# Altium PCB nrf52833_cjaa_var4.PcbDoc
Units mm, origin at the board's own origin, x right, y up, seen from the top; angles counter-clockwise.
Board outline 12 x 12 mm, 6 copper layers (Top Layer, Mid Layer 1, Mid Layer 2, Mid Layer 3, Mid Layer 4, Bottom Layer), stack 1.613 mm thick; 24 components, 61 nets, 161 pads, 108 vias.
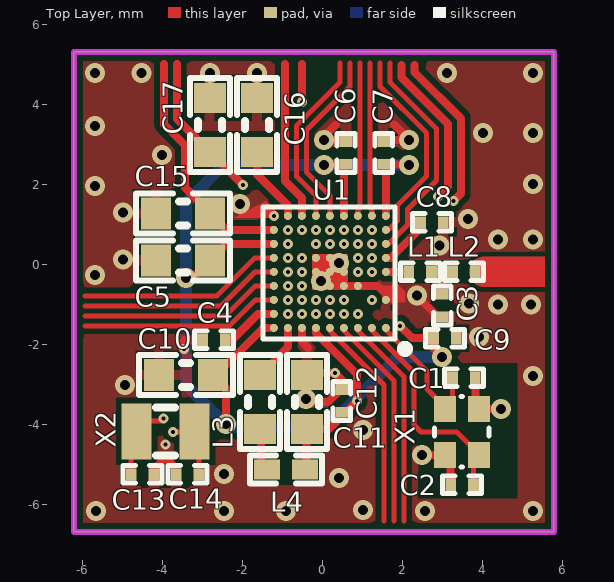
[diagram p0: Top Layer view]
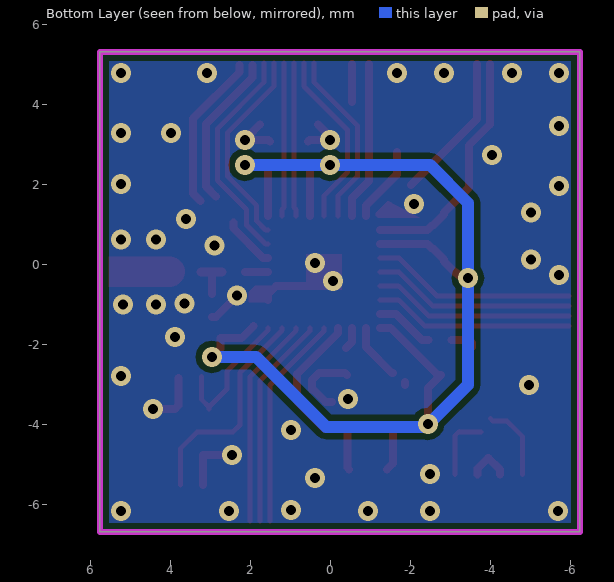
[diagram p1: Bottom Layer view, seen from below]
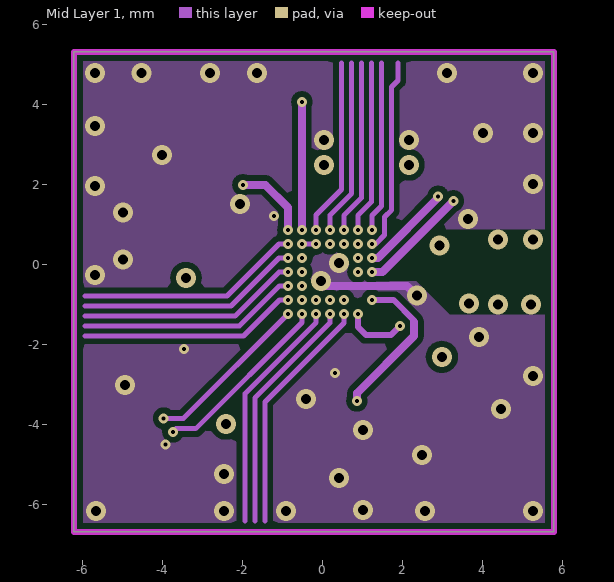
[diagram p2: Mid Layer 1]
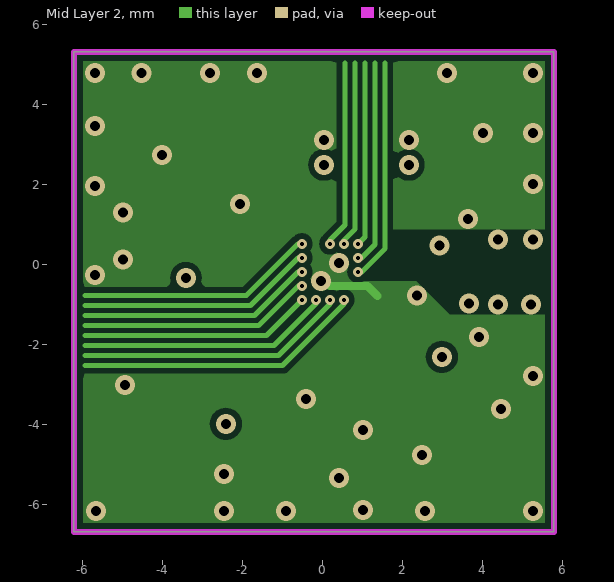
[diagram p3: Mid Layer 2]
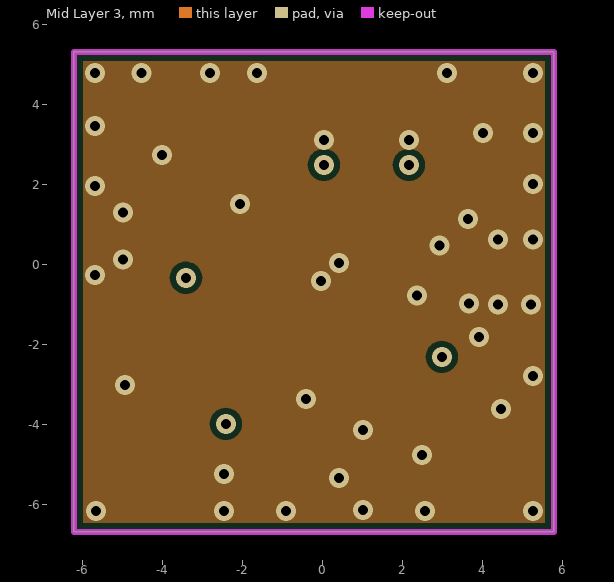
[diagram p4: Mid Layer 3]
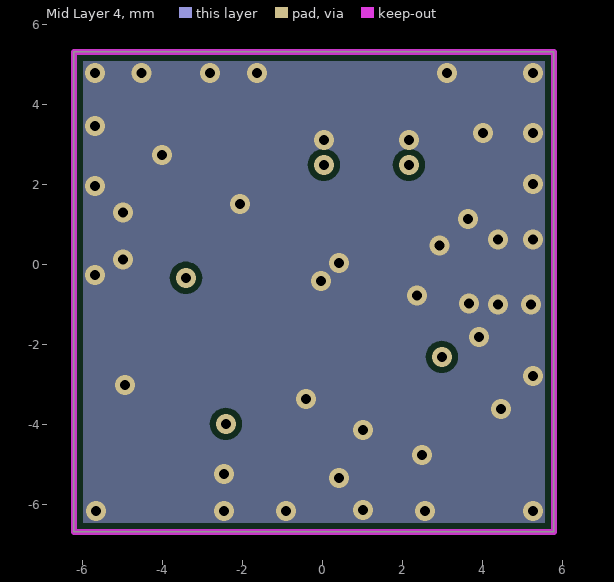
[diagram p5: Mid Layer 4]
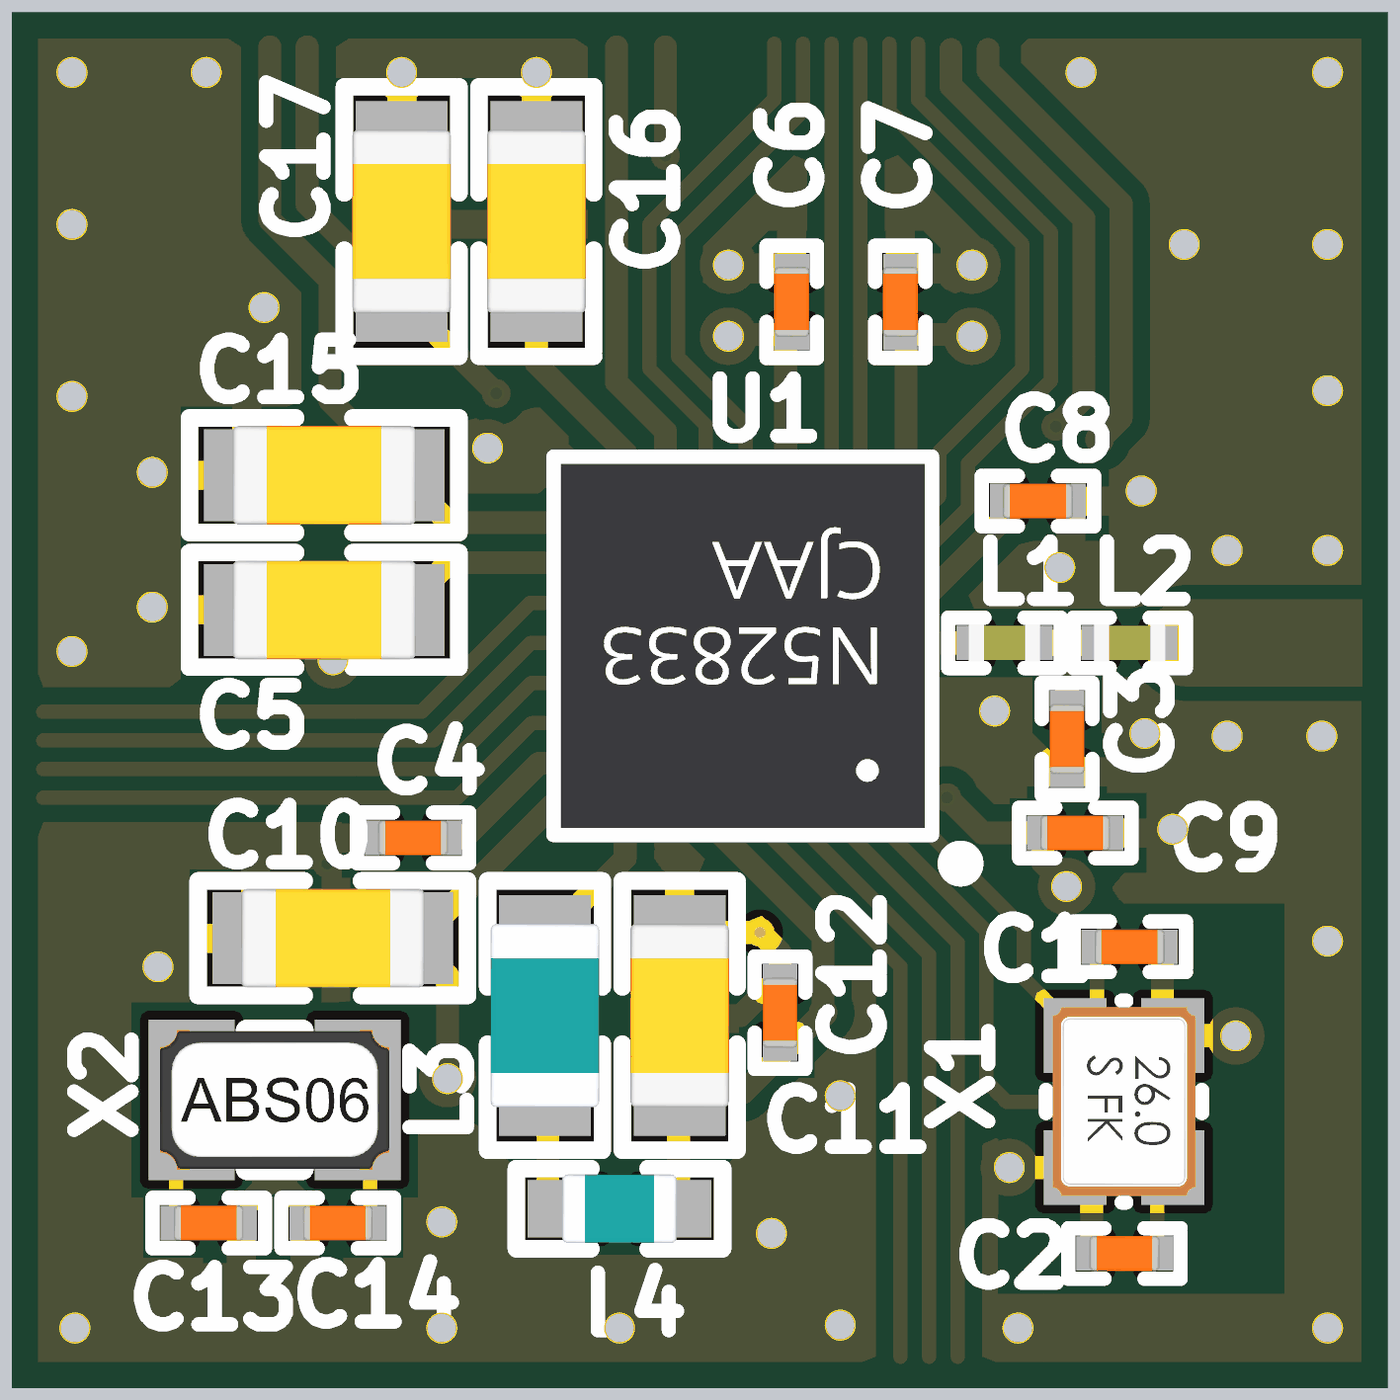
[diagram p6: 3D render of the assembled board from above, using the file's embedded part models]

## Layer stack, top to bottom
Top Solder: solder mask 0.0102, Solder Resist, Dk 3.5
Top Layer: signal copper 0.0356
Dielectric1: core 0.1, FR-4, Dk 4.8
Mid Layer 1: signal copper 0.036
Dielectric 3: prepreg 0.1, Dk 4.2
Mid Layer 2: signal copper 0.036
Dielectric 1: prepreg 1, PP-006, Dk 4.1
Mid Layer 3: signal copper 0.035
Dielectric 4: prepreg 0.1, PP-006, Dk 4.1
Mid Layer 4: signal copper 0.035
Dielectric 2: core 0.1, Dk 4.2
Bottom Layer: signal copper 0.0356
Bottom Solder: solder mask 0.0102, Solder Resist, Dk 3.5

## Board outline
-6.225,-6.675 5.775,-6.675 5.775,5.325 -6.225,5.325

## Design rules (kind name [scope] priority, off if disabled: settings)
Clearance Polygon_ANT [(InNamedPolygon('Top_Layer-GND')) or  (InNamedPolygon('Mid_Layer_1-GND')) or (InNamedPolygon('Mid_Layer_3-GND')) or (InNamedPolygon('Bottom_Layer-GND')) vs InNet('RF')] p1: gap=0.125 ignorepadtopadclearanceinfootprint=FALSE
Clearance Polygon [(InNamedPolygon('Top_Layer-GND')) or  (InNamedPolygon('Mid_Layer_1-GND')) or  (InNamedPolygon('Mid_Layer_2-GND')) or (InNamedPolygon('Mid_Layer_3-GND')) or  (InNamedPolygon('Mid_Layer_4-GND')) or (InNamedPolygon('Bottom_Layer-GND'))] p2: gap=0.15 ignorepadtopadclearanceinfootprint=FALSE
Clearance Clearance_Multi [OnLayer('Multi-Layer') vs OnLayer('Multi-Layer')] p3: gap=0.1 ignorepadtopadclearanceinfootprint=FALSE
Clearance Clearance_Top [OnLayer('Top Layer')] p4: gap=0.125 ignorepadtopadclearanceinfootprint=FALSE
Clearance [All] p5: gap=0.125 ignorepadtopadclearanceinfootprint=FALSE
ComponentClearance [All] p1 off: gap=0.254 collisioncheckmode=3 verticalgap=0.254 showdistances=FALSE
FabricationTestPointUsage TestPointUsage [All] p1: valid=0 allowmultiple=FALSE
FabricationTestpoint Testpoint [All] p1: side=3 testpointundercomponent=TRUE minsize=1.016 maxsize=2.54 preferedsize=1.524 minholesize=0 maxholesize=1.016 preferedholesize=0.813 testpointgrid=0.025 allowsidetop=TRUE allowsidebottom=TRUE usegrid=TRUE gridtolerance=0
Height [All] p1 off: minheight=0 maxheight=25.4 prefheight=12.7
HoleSize [All] p1: absolutevalues=TRUE maxlimit=4.064 minlimit=0.1 maxpercent=80.000 minpercent=20.000
MinimumAnnularRing [All] p1 off: minimumring=0.152
PlaneConnect [All] p1: planeconnectstyle=Relief reliefexpansion=0.508 reliefentries=4 reliefconductorwidth=0.254 reliefairgap=0.15
PolygonConnect PolygonConnect_1 [isVia and innet(gnd)] p1: connectstyle=Direct reliefconductorwidth=0.254 reliefentries=4 polygonreliefangle="90 Angle" airgapwidth=0.254
PolygonConnect [All] p2: connectstyle=Relief reliefconductorwidth=0.254 reliefentries=4 polygonreliefangle="90 Angle" airgapwidth=0.2
RoutingVias [All] p1: holewidth=0.2 width=0.35 viastyle="Through Hole" minholewidth=0.1 minwidth=0.25 maxholewidth=0.25 maxwidth=0.5
SilkToSolderMaskClearance SilkscreenOverComponentPads [IsPad] p1: minsilkscreentomaskgap=0.254 clearancetoexposedcopper=TRUE
SolderMaskExpansion [All] p1: expansion=0.076 istentingtop=FALSE
Width [All] p1: maxlimit=2.54 minlimit=0.095 preferedwidth=0.15 toplayer_maxwidth=2 midlayer1_minwidth=0.1 midlayer1_maxwidth=2 midlayer2_minwidth=0.1 midlayer2_maxwidth=2 midlayer3_minwidth=0.1 midlayer4_minwidth=0.1 bottomlayer_minwidth=0.1 bottomlayer_maxwidth=2 minimp=50.000000 maximp=50.000000 favimp=50.000000
23 further rules are at their usual default settings.

## Components (designator, comment, footprint, x,y, rotation, side; value= is the part's Value field where it differs from the comment)
C1 "12pF" CAPC0603X03L_C 3.525,-2.825 r0 top
C2 "12pF" CAPC0603X03L_C 3.479,-5.5 r180 top
C3 "0.8pF" CAPC0603X03L_C 2.979,-1.013 r90 top
C4 "100nF" CAPC0603X03L_C -2.725,-1.875 r180 top
C5 "4.7µF" CAPC1608X06L -3.5,0.112 r180 top
C6 "100nF" CAPC0603X03L_C 0.578,2.8 r90 top
C7 "100nF" CAPC0603X03L_C 1.525,2.8 r90 top
C8 "820pF" CAPC0603X03L_C 2.724,1.062 r0 top
C9 "100nF" CAPC0603X03L_C 3.05,-1.832 r0 top
C10 "1.0µF" CAPC1608X06L -3.425,-2.75 r180 top
C11 "1.0µF" CAPC1608X06L -0.4,-3.425 r270 top
C12 "47nF" CAPC0603X03L_C 0.475,-3.4 r90 top
C13 "12pF" CAPC0603X03L_C -4.507,-5.235 r0 top
C14 "12pF" CAPC0603X03L_C -3.382,-5.235 r180 top
C15 "4.7µF" CAPC1608X06L -3.5,1.287 r180 top
C16 "4.7µF" CAPC1608X06L -1.65,3.5 r90 top
C17 "4.7µF" CAPC1608X06L -2.825,3.5 r90 top
L1 "3.9nH" INDC0603X03L_C 2.432,-0.175 r0 top
L2 "5.6nH" INDC0603X03L_C 3.525,-0.175 r0 top
L3 "10µH" INDC1608X06L -1.575,-3.425 r90 top
L4 "15nH" INDC1005X04L -0.925,-5.11 r180 top
U1 "nRF52833-CJAA" BGA75C35P10X10_318X318X50 0.175,-0.175 r180 top locked
X1 "32MHz" BT-XTAL_1612 3.475,-4.175 r270 top
X2 "32.768kHz" XTAL_2012 -3.932,-4.16 r0 top

## Footprints (in the part's own frame and the unit in brackets; to place one, negate y for a bottom-side part, rotate by r counter-clockwise, add the part's x,y. Pads: shape width x height; smd on the part's side, far side on the other; paste and mask are expansions set on the pad)
BGA75C35P10X10_318X318X50 [mm] "BGA, 75-Leads, Body 3.18x3.18mmx0.50mm, Pitch 0.35mm"
  round 0.2 smd mask+0.04: A1(-1.4,1.4) A2(-1.05,1.4) A3(-0.7,1.4) A4(-0.35,1.4) A5(0,1.4) A6(0.35,1.4) A7(0.7,1.4) A8(1.05,1.4) A9(1.4,1.4) B3(-0.7,1.05) B4(-0.35,1.05) B5(0,1.05) B6(0.35,1.05) B7(0.7,1.05) B8(1.05,1.05) B9(1.4,1.05) C1(-1.4,0.7) C2(-1.05,0.7) C4(-0.35,0.7) C5(0,0.7) C6(0.35,0.7) C7(0.7,0.7) C8(1.05,0.7) C9(1.4,0.7) D3(-0.7,0.35) D4(-0.35,0.35) D5(0,0.35) D6(0.35,0.35) D7(0.7,0.35) D8(1.05,0.35) D9(1.4,0.35) E1(-1.4,0) E2(-1.05,0) E3(-0.7,0) E4(-0.35,0) E5(0,0) E6(0.35,0) E7(0.7,0) E8(1.05,0) E9(1.4,0) F1(-1.4,-0.35) F2(-1.05,-0.35) F3(-0.7,-0.35) F4(-0.35,-0.35) F5(0,-0.35) F6(0.35,-0.35) F7(0.7,-0.35) F8(1.05,-0.35) F9(1.4,-0.35) G1(-1.4,-0.7) G2(-1.05,-0.7) G3(-0.7,-0.7) G4(-0.35,-0.7) G5(0,-0.7) G6(0.35,-0.7) G8(1.05,-0.7) G9(1.4,-0.7) H1(-1.4,-1.05) H2(-1.05,-1.05) H3(-0.7,-1.05) H4(-0.35,-1.05) H5(0,-1.05) H6(0.35,-1.05) H7(0.7,-1.05) H8(1.05,-1.05) H9(1.4,-1.05) J1(-1.4,-1.4) J2(-1.05,-1.4) J3(-0.7,-1.4) J4(-0.35,-1.4) J5(0,-1.4) J6(0.35,-1.4) J7(0.7,-1.4) J8(1.05,-1.4) J9(1.4,-1.4)
  silkscreen extent -1.97,-1.62 1.68,2.02, body extent -1.56,-1.56 1.61,1.61, height 0.47
BT-XTAL_1612 [mm] "Crystal 1.6 x 1.2 mm"
  rect 0.65x0.55 smd: 1(-0.575,-0.425) 2(0.575,-0.425) 3(0.575,0.425) 4(-0.575,0.425)
  silkscreen extent -0.88,-0.68 0.88,0.68, body extent -0.83,-0.63 0.83,0.63, height 0.41
CAPC0603X03L_C [mm] "Chip Capacitor, 2-Leads, Body 0.6x0.3mm, IPC High Density"
  rect 0.27x0.3 smd: 1(-0.285,0) 2(0.285,0)
  silkscreen extent -0.49,-0.22 0.49,0.22, body extent -0.3,-0.15 0.31,0.15, height 0.3
CAPC1608X06L [mm] "Chip Capacitor, 2-Leads, Body 1.6x0.8mm, IPC High Density"
  rect 0.75x0.8 smd: 1(-0.675,0) 2(0.675,0)
  silkscreen extent -1.17,-0.5 1.17,0.5, body extent -0.8,-0.43 0.8,0.43, height 0.8
INDC0603X03L_C [mm] "Chip Inductor, 2-Leads, Body 0.6x0.3mm, IPC High Density"
  rect 0.27x0.3 smd: 1(-0.285,0) 2(0.285,0)
  silkscreen extent -0.49,-0.22 0.49,0.22, body extent -0.31,-0.16 0.31,0.16, height 0.26
INDC1005X04L [mm] "Chip Inductor, 2-Leads, Body 1.0x0.5mm, IPC High Density"
  rect 0.65x0.5 smd: 1(-0.475,0) 2(0.475,0)
  silkscreen extent -0.9,-0.35 0.9,0.35, body extent -0.5,-0.3 0.5,0.3, height 0.5
INDC1608X06L [mm] "Chip Inductor, 2-Leads, Body 1.6x0.8mm, IPC High Density"
  rect 0.75x0.8 smd: 1(-0.675,0) 2(0.675,0)
  silkscreen extent -1.17,-0.5 1.17,0.5, body extent -0.8,-0.48 0.8,0.48, height 0.8
XTAL_2012 [mm] "XTAL SMD 2.0 x 1.2 mm"
  rect 0.75x1.4 smd: 1(-0.725,0) 2(0.725,0)
  silkscreen extent -0.24,-0.6 0.24,0.6, body extent -1,-0.61 1,0.61, height 0.6

## Part data
C1 C2 C13 C14: library part C0201-12p, "Capacitor, NP0, ±2%", Footprint Doc=0201, LatestRevisionDate=2017-11-09, Part Number=C0201-12p, Pin Count=2, Published=2014-11-13, Publisher="Nordic Semiconductor"
C3: library part C0201-0.8p, "Capacitor, NP0, ±5%", Footprint Doc=0201, LatestRevisionDate=2018-10-22, Part Number=C0201-0.8p, Pin Count=2, Published=2014-11-13, Publisher="Nordic Semiconductor"
C4 C6 C7 C9: library part C0201-100n, "Capacitor, X7S, ±10%", Footprint Doc=0201, LatestRevisionDate=2017-11-09, Part Number=C0201-100n, Pin Count=2, Published=2014-11-13, Publisher="Nordic Semiconductor"
C5 C16: library part C0603-4µ7-6.3V-X7R, "Capacitor, X7R, ±10%", Footprint Doc=0603, LatestRevisionDate=2015-06-10, Part Number=C0603-4µ7-6.3V-X7R, Pin Count=2, Published=2015-06-10, Publisher="Nordic Semiconductor"
C8: library part C0201-820p, "Capacitor, X7R, ±10%", Assembly="Not required for Bxx and later", Footprint Doc=0201, LatestRevisionDate=2017-11-09, Part Number=C0201-820p, Pin Count=2, Published=2014-11-13, Publisher="Nordic Semiconductor"
C10 C11: library part C0603-1µ0, "Capacitor, X7R, ±10%", Footprint Doc=0603, LatestRevisionDate=2013-06-05, Part Number=C0603-1µ0, Pin Count=2, Published=2009-05-08, Publisher="Nordic Semiconductor"
C12: library part C0201-47n, "Capacitor, X7S, ±10%", Footprint Doc=0201, LatestRevisionDate=2017-11-09, Part Number=C0201-47n, Pin Count=2, Published=2014-11-13, Publisher="Nordic Semiconductor"
C15 C17: library part C0603-4µ7-10V-X7S, "Capacitor, X7S, ±10%", Footprint Doc=0603, LatestRevisionDate=2016-08-15, Part Number=C0603-4µ7-10V-X7S, Pin Count=2, Published=2016-08-15, Publisher="Nordic Semiconductor"
L1: library part L0201-3n9, "High frequency chip inductor ±5%", Footprint Doc=0201, LatestRevisionDate=2017-11-09, Part Number=L0201-3n9, Pin Count=2, Published=2013-04-10, Publisher="Nordic Semiconductor"
L2: library part L0201-5n6, "High frequency chip inductor ±5%", Footprint Doc=0201, LatestRevisionDate=2013-04-10, Part Number=L0201-5n6, Pin Count=2, Published=2013-04-10, Publisher="Nordic Semiconductor"
L3: library part L0603-10µ-TDK, "Chip inductor, IDC,min = 50 mA, ±20%", Footprint Doc=0603, LatestRevisionDate=2012-09-19, Part Number=L0603-10µ-TDK, Pin Count=2, Published=2019-05-06, Publisher="Nordic Semiconductor"
L4: library part L0402-15n, "High frequency chip inductor ±10%", Footprint Doc=0402, LatestRevisionDate=2012-09-19, Part Number=L0402-15n, Pin Count=2, Published=2010-07-12, Publisher="Nordic Semiconductor"
U1: "Multi-protocol Bluetooth Low Energy, IEEE 802.15.4, ANT and 2.4GHz proprietary system-on-chip", Footprint Doc=WLCSP-75, LatestRevisionDate=2019-12-19, Part Number=nRF52833-CJAA, Pin Count=75, Published=2019-02-08, Publisher="Nordic Semiconductor"
X1: library part XTAL_SMD1612_32MHz_8pF_General, "XTAL SMD 1612, 32MHz, Cl=8pF, Total Tol: ±40ppm", Footprint Doc=XTAL_1612, LatestRevisionDate=2016-08-19, Part Number=XTAL_SMD1612_32MHz_8pF_General, Pin Count=4, Published=2016-08-19, Publisher="Nordic Semiconductor"
X2: library part XTAL_SMD2012_32.768kHz_9pF_General, "XTAL SMD 2012, 32.768kHz, Cl=9pF, Total Tol: ±50ppm", Footprint Doc=XTAL_2012, LatestRevisionDate=2017-01-11, Part Number=XTAL_SMD2012_32.768kHz_9pF_General, Pin Count=2, Published=2016-08-19, Publisher="Nordic Semiconductor"

## Free pads (board coordinates)
  round 0.25 on Mech16: 1(-1.225,1.225) 1(-0.875,-0.525) 1(-0.875,-0.175) 1(-0.875,0.175) 1(-0.875,0.525) 1(-0.875,-1.225) 1(-0.875,-0.875) 1(-0.875,0.875) 1(-0.525,-0.525) 1(-0.525,-0.175) 1(-0.525,0.175) 1(-0.525,-1.225) 1(-0.525,-0.875) 1(-0.525,0.875) 1(-0.175,0.525) 1(-0.175,-1.225) 1(-0.175,-0.875) 1(-0.175,0.875) 1(0.175,-1.225) 1(0.175,-0.875) 1(0.175,0.525) 1(0.175,0.875) 1(0.525,-0.875) 1(0.525,-1.225) 1(0.525,0.525) 1(0.525,0.875) 1(0.875,-0.175) 1(0.875,-1.225) 1(0.875,0.175) 1(0.875,0.525) 1(0.875,0.875) 1(1.225,-0.879) 1(1.225,-0.175) 1(1.225,0.175) 1(1.225,0.525) 1(1.225,0.875)
  round 0.5 on Mech16: 1(-0.05,-0.4) 1(0.4,0.05)

## Via types
v1: diameter 0.5, hole 0.25, Top Layer to Bottom Layer, tented both sides, 48 vias
v2: diameter 0.25, hole 0.1, Top Layer to Mid Layer 1, tented both sides, 45 vias
v3: diameter 0.25, hole 0.1, Mid Layer 1 to Mid Layer 2, tented both sides, 13 vias
v4: diameter 0.25, hole 0.1, Top Layer to Mid Layer 1, 2 vias

## Nets (pads, with @x,y where several pads share a name; then routed paths per layer and width w, separated by ;. In a path a pad name is that pad's centre, name@x,y a point inside that pad or via, vN(x,y) a via of type N, cw(c..) or ccw(c..) an arc to the next point about the centre after c; other vN are vias at no path point)
D+: U1.J7 | length 4
  Top Layer w0.2: -0.95,5.023 -0.95,2.096 -0.525,1.671 U1.J7
D-: U1.H7 | length 4.1
  Top Layer w0.2: v2(-0.525,4.075) -0.525,5.023
  Mid Layer 1 w0.2: v2(-0.525,0.875) v2(-0.525,4.075)
DEC1: C4.1 U1.B9 | length 1.5
  Top Layer w0.2: C4.1 -2.275,-1.875 -1.625,-1.225 U1.B9
DEC4_6: C11.2 C12.1 L4.1 U1.A6 U1.C2 | length 8.7
  Top Layer w0.2: L4.1 -0.41,-5.07 C11.2@-0.41,-4.05 ; C11.2 0.15,-4.1 v2(0.85,-3.4) 0.85,-2.732 -0.175,-1.707 U1.A6
  Mid Layer 1 w0.15: v2(1.225,-0.879) 1.768,-0.879 2.275,-1.386 2.275,-1.425
  Mid Layer 1 w0.2: v2(0.85,-3.4) 0.85,-3.207 2.28,-1.777 2.28,-1.425
GND: C1.2 C2.2 C3.1 C4.2 C5.2 C6.2 C7.2 C8.2 C9.2 C10.2 C11.1 C12.2 C13.2 C14.2 C15.2 C16.2 C17.2 U1.A7 U1.C1 U1.D3 U1.D4 U1.D5 U1.D6 U1.E4 U1.E5 U1.E6 U1.F4 U1.F5 U1.F6 U1.J9 X1.2 X1.4 | length 15.1
  Top Layer w0.2: C13.2 -4.222,-5.118 -3.933,-4.829 -3.931,-4.829 -3.667,-5.093 C14.2 ; v2@-3.525,-2.05 -3.525,-1.95 -3.45,-1.875 C4.2 ; U1.A7 -0.525,-1.925 -0.375,-2.075 ; C11.1 -0.35,-2.7 v4(0.3,-2.7) 0.475,-2.875 C12.2 0.442,-3.115 0.132,-3.425 -0.025,-3.425 ; 0.325,3.511 0.028,3.214 0.028,3.12 0.542,3.12 C6.2 ; U1.D4 U1.D3 1.312,-0.525 1.316,-0.529 1.37,-0.529 1.575,-0.734 U1.C1 ; C7.2 1.56,3.12 v1@2.075,3.12 ; 1.778,3.511 v1@2.075,3.214 ; v1(2.347,-0.769) 2.876,-1.298 C3.1 ; v1(2.475,-4.75) X1.2 3.194,-4.75 C2.2 ; C1.2 3.81,-3.51 X1.4 4.475,-3.6 4.472,-3.603 v1(4.45,-3.603)
  Mid Layer 1 w0.2: v1(-0.05,-0.4) 0.075,-0.525 2.1,-0.525 v1@2.25,-0.675
  Mid Layer 2 w0.2: v1@0,-0.35 0.175,-0.525 1.113,-0.525 1.362,-0.775
  other v1: -5.675,-6.15 -2.475,-6.15 -0.925,-6.15 2.55,-6.15 5.25,-6.15 1,-6.125 0.4,-5.325 -2.475,-5.225 1,-4.125 -0.425,-3.35 -4.95,-3 5.25,-2.775 3.9,-1.8 4.375,-0.988 5.2,-0.988 3.658,-0.965 -5.7,-0.25 0.4,0.05 -5,0.137 2.915,0.482 4.375,0.632 5.25,0.632 3.625,1.15 -5,1.312 -2.075,1.525 -5.7,1.975 5.25,2.025 -4.025,2.75 0.025,3.12 2.15,3.12 4,3.3 5.25,3.3 -5.7,3.475 -5.7,4.8 -4.529,4.8 -2.825,4.8 -1.65,4.8 3.1,4.8 5.25,4.8
  other v2: -3.931,-4.495 -3.475,-2.1 -1.225,1.225
NetC3_2: C3.2 L1.2 L2.1 | length 1.1
  Top Layer w0.203: C3.2 2.979,-0.188 2.991,-0.175
  Top Layer w0.229: L1.2@2.724,-0.175 2.991,-0.175 L2.1 L2.1@3.252,-0.175
NetC8_1: C8.1 U1.F1 | length 1.3
  Top Layer w0.2: U1.F1 1.695,0.175 2.439,0.919 C8.1
NetC16_1: C16.1 U1.J8 | length 1.9
  Top Layer w0.2: C16.1 -1.65,2.262 -0.875,1.487 U1.J8
NetL1_1: L1.1 U1.E1 | length 0.6
  Top Layer w0.2: U1.E1 L1.1
NetL3_1: L3.1 L4.2 | length 1.1
  Top Layer w0.2: L3.1@-1.554,-4.058 -1.55,-4.062 -1.55,-4.96 L4.2
NetL3_2: L3.2 U1.A8 | length 1.5
  Top Layer w0.2: L3.2@-1.85,-3.008 L3.2@-1.85,-2.921 ; L3.2@-1.554,-2.708 -1.529,-2.708 -0.875,-2.053 U1.A8
P0.00/XL1: C13.1 U1.B8 X2.1 | length 6.1
  Top Layer w0.125: C13.1 -4.792,-4.295 X2.1 ; X2.1@-4.632,-4.135 -4.397,-3.9 -4.047,-3.9 v2(-3.982,-3.835)
  Mid Layer 1 w0.125: v2(-3.982,-3.835) -3.485,-3.835 v2(-0.875,-1.225)
P0.01/XL2: C14.1 U1.B7 X2.2 | length 6.2
  Top Layer w0.125: v4(-3.75,-4.175) -3.222,-4.175 X2.2 -3.097,-4.27 C14.1
  Mid Layer 1 w0.125: v4(-3.75,-4.175) -3.67,-4.095 -3.181,-4.095 -0.525,-1.439 v2(-0.525,-1.225)
P0.02/AIN0: U1.C6 | length 6.3
  Mid Layer 2 w0.125: -5.95,-2.013 -1.221,-2.013 -0.175,-0.967 v3(-0.175,-0.875)
  other v2: -0.175,-0.875
P0.03/AIN1: U1.A4 | length 5.3
  Top Layer w0.125: U1.A4 0.525,-1.646 1.775,-2.896 1.775,-6.4
P0.04/AIN2: U1.D8 | length 5.5
  Mid Layer 1 w0.125: -5.95,-1.525 -2.089,-1.525 -1.089,-0.525 v2(-0.875,-0.525)
P0.05/AIN3: U1.D9 | length 5
  Top Layer w0.125: -5.95,-1.275 -2.445,-1.275 -1.695,-0.525 U1.D9
P0.06: U1.E9 | length 5.1
  Top Layer w0.125: -5.95,-1.025 -2.548,-1.025 -1.698,-0.175 U1.E9
P0.07: U1.E8 | length 5.5
  Mid Layer 1 w0.125: -5.95,-1.275 -2.193,-1.275 -1.093,-0.175 v2(-0.875,-0.175)
P0.08: U1.E7 | length 5.9
  Mid Layer 2 w0.125: -5.95,-1.263 -1.708,-1.263 -0.621,-0.175 v3(-0.525,-0.175)
  other v2: -0.525,-0.175
P0.09/NFC1: U1.F2 | length 6.2
  Top Layer w0.2: 1.965,5 1.965,4.684 3.125,3.524 3.125,1.957 v2(2.88,1.713)
  Mid Layer 1 w0.2: v2(1.225,0.175) 1.377,0.175 2.88,1.678 v2(2.88,1.713)
P0.10/NFC2: U1.E2 | length 6.7
  Top Layer w0.2: 2.29,5 2.29,4.818 3.45,3.658 3.45,1.787 v2(3.263,1.6)
  Mid Layer 1 w0.2: v2(1.225,-0.175) 1.488,-0.175 v2(3.263,1.6)
P0.11: U1.G8 | length 5.6
  Mid Layer 1 w0.125: -5.95,-0.775 -2.4,-0.775 -1.1,0.525 v2(-0.875,0.525)
P0.12: U1.H6 | length 4.4
  Mid Layer 1 w0.125: v2(-0.175,0.875) -0.175,1.248 0.463,1.886 0.463,5.05
P0.13: U1.F7 | length 5.9
  Mid Layer 2 w0.125: -5.95,-1.013 -1.812,-1.013 -0.624,0.175 v3(-0.525,0.175)
  other v2: -0.525,0.175
P0.14: U1.J6 | length 4.5
  Top Layer w0.125: U1.J6 -0.175,1.728 -0.663,2.215 -0.663,3.479 0.425,4.566 0.425,5.05
P0.15: U1.H5 | length 4.4
  Mid Layer 1 w0.125: v2(0.175,0.875) 0.175,1.245 0.713,1.782 0.713,5.05
P0.16: U1.G6 | length 6.3
  Mid Layer 1 w0.125: v3(-0.525,0.525) v2(-0.175,0.525)
  Mid Layer 2 w0.125: -5.95,-0.763 -1.915,-0.763 -0.628,0.525 v3(-0.525,0.525)
P0.17: U1.J5 | length 4.5
  Top Layer w0.125: U1.J5 0.175,1.731 -0.412,2.319 -0.412,3.375 0.675,4.462 0.675,5.05
P0.18/RESET: U1.H4 | length 4.4
  Mid Layer 1 w0.125: v2(0.525,0.875) 0.525,1.241 0.963,1.679 0.963,5.05
P0.19: U1.C5 | length 6.8
  Mid Layer 2 w0.125: -5.95,-2.263 -1.113,-2.263 0.175,-0.975 v3(0.175,-0.875)
  other v2: 0.175,-0.875
P0.20: U1.G5 | length 4.7
  Mid Layer 2 w0.125: v2(0.175,0.525) 0.175,0.62 0.55,0.995 0.55,5.05
  other v3: 0.175,0.525
P0.21: U1.G4 | length 4.6
  Mid Layer 2 w0.125: v3(0.525,0.525) 0.525,0.617 0.8,0.892 0.8,5.05
  other v2: 0.525,0.525
P0.22: U1.J3 | length 3.8
  Top Layer w0.125: U1.J3 0.875,1.387 0.925,1.437 0.925,5.05
P0.23: U1.D7 | length 5.8
  Mid Layer 2 w0.125: -5.95,-1.513 -1.604,-1.513 -0.617,-0.525 v3(-0.525,-0.525)
  other v2: -0.525,-0.525
P0.24: U1.G3 | length 4.6
  Mid Layer 2 w0.125: v2(0.875,0.525) 1.05,0.7 1.05,5.05
  other v3: 0.875,0.525
P0.25: U1.A3 | length 5.3
  Top Layer w0.125: U1.A3 0.875,-1.643 2.025,-2.793 2.025,-6.4
P0.26: U1.C9 | length 5
  Top Layer w0.125: -5.95,-1.525 -2.341,-1.525 -1.691,-0.875 U1.C9
P0.27: U1.C8 | length 5.4
  Mid Layer 1 w0.125: -5.95,-1.775 -1.986,-1.775 -1.086,-0.875 v2(-0.875,-0.875)
P0.28/AIN4: U1.C7 | length 5.8
  Mid Layer 2 w0.125: -5.95,-1.763 -1.413,-1.763 v3(-0.525,-0.875)
  other v2: -0.525,-0.875
P0.29/AIN5: U1.A5 | length 5.4
  Top Layer w0.125: U1.A5 0.175,-1.65 1.525,-3 1.525,-6.4
P0.30/AIN6: U1.B5 | length 6
  Mid Layer 1 w0.125: -1.7,-6.401 -1.7,-3.321 0.175,-1.446 v2(0.175,-1.225)
P0.31/AIN7: U1.B6 | length 5.9
  Mid Layer 1 w0.125: -1.95,-6.401 -1.95,-3.218 -0.175,-1.443 v2(-0.175,-1.225)
P1.00: U1.H3 | length 4.3
  Mid Layer 1 w0.125: v2(0.875,0.875) 0.875,1.238 1.213,1.575 1.213,5.05
P1.01: U1.F3 | length 5.1
  Mid Layer 2 w0.125: v3(0.875,0.175) 0.967,0.175 1.3,0.508 1.3,5.05
  other v2: 0.875,0.175
P1.02: U1.H1 | length 5.1
  Top Layer w0.125: 1.428,5.05 1.428,4.461 2.587,3.301 2.587,2.215 1.863,1.49 1.863,1.102 1.635,0.875 U1.H1
P1.03: U1.B4 | length 6
  Mid Layer 1 w0.125: -1.45,-6.401 -1.45,-3.425 0.525,-1.45 v2(0.525,-1.225)
P1.04: U1.G2 | length 4.9
  Mid Layer 1 w0.125: v2(1.225,0.525) 1.321,0.525 1.542,0.746 1.542,1.197 1.713,1.368 1.713,4.45 1.875,4.613 1.875,5.05
P1.05: U1.C4 | length 7.2
  Mid Layer 2 w0.125: -5.95,-2.513 -1.009,-2.513 0.525,-0.979 v3(0.525,-0.875)
  other v2: 0.525,-0.875
P1.06: U1.E3 | length 5.6
  Mid Layer 2 w0.125: v3(0.875,-0.175) 0.97,-0.175 1.55,0.405 1.55,5.05
  other v2: 0.875,-0.175
P1.07: U1.G1 | length 5.6
  Top Layer w0.125: U1.G1 1.639,0.525 2.113,0.999 2.113,1.387 2.838,2.112 2.838,3.405 1.678,4.565 1.678,5.05
P1.08: U1.F9 | length 5.1
  Top Layer w0.125: -5.95,-0.775 -2.652,-0.775 -1.702,0.175 U1.F9
P1.09: U1.F8 | length 5.6
  Mid Layer 1 w0.125: -5.95,-1.025 -2.296,-1.025 -1.096,0.175 v2(-0.875,0.175)
RF: L2.2 | length 1.1
  Top Layer w0.762: 4.033,-0.175 5.175,-0.175
SWDCLK: U1.H2 | length 4.3
  Mid Layer 1 w0.125: v2(1.225,0.875) 1.225,1.234 1.463,1.472 1.463,5.05
SWDIO: U1.J2 | length 3.8
  Top Layer w0.125: 1.175,5.05 1.175,1.437 1.225,1.387 U1.J2
VBUS: C17.1 U1.H8 | length 5.6
  Top Layer w0.2: -3.65,5.023 -3.65,3.65 C17.1 v2(-2,2)
  Mid Layer 1 w0.2: v2(-2,2) -1.441,2 -0.875,1.434 v2(-0.875,0.875)
VDD_NRF: C5.1 C6.1 C7.1 C9.1 C10.1 U1.A9 U1.B3 U1.G9 U1.J1 U1.J4 | length 30.8
  Top Layer w0.2: v1(-3.424,-0.322) -3.366,-0.265 -3.202,-0.265 -3.125,-0.188 -3.1,-0.188 -2.825,0.087 C5.1 ; C5.1@-2.825,0.138 -2.55,0.413 -2.525,0.413 -2.412,0.525 U1.G9 ; v1(-2.425,-3.975) -2.425,-3.075 C10.1 -2.668,-2.75 -1.493,-1.575 U1.A9 ; v1(0.025,2.5) 0.04,2.515 0.575,2.515 0.525,2.464 U1.J4 ; U1.J1 1.575,2.464 C7.1 v1@2.06,2.515 ; v2(1.93,-1.524) 2.239,-1.832 C9.1 2.765,-2.091 v1(2.974,-2.3)
  Mid Layer 1 w0.15: v2(0.875,-1.225) 0.875,-1.55 1.075,-1.75 1.704,-1.75 v2(1.93,-1.524)
  Bottom Layer w0.3: v1(2.15,2.5) v1(0.025,2.5) -2.475,2.5 -3.424,1.551 v1(-3.424,-0.322) -3.424,-3.001 -2.375,-4.05 0.125,-4.05 1.875,-2.3 v1(2.974,-2.3)
VDDH: C15.1 U1.H9 | length 6
  Top Layer w0.2: -3.975,5.023 -3.975,3.515 -3.45,2.99 -3.45,1.938 -2.825,1.312 C15.1 -2.825,1.262 -2.55,0.987 -2.525,0.987 -2.412,0.875 U1.H9
XC1: C1.1 U1.A1 X1.1 | length 3.5
  Top Layer w0.125: U1.A1 1.575,-1.636 2.6,-2.661 2.6,-3.1 X1.1@3.05,-3.55 ; C1.1@3.24,-2.795 3.24,-3.36 X1.1@3.05,-3.55 ; X1.1@3.05,-3.55 X1.1 X1.1@3.05,-3.55
XC2: C2.1 U1.A2 X1.3 | length 5.5
  Top Layer w0.125: U1.A2 1.225,-1.639 2.275,-2.689 2.275,-4 2.454,-4.179 3.344,-4.179 3.764,-4.599 C2.1

## Polygon pours and split planes (outlines as drawn)
GND on Mid Layer 2 "Mid_Layer_2-GND" (solid, remove dead copper, pour order 1008): -7.5,7.5 -7.5,-7.5 7.5,-7.5 7.5,7.5
GND on Mid Layer 1 "Mid_Layer_1-GND" (solid, remove dead copper, pour order 1004): -7.5,7.5 -7.5,-7.5 7.5,-7.5 7.5,7.5
GND on Mid Layer 3 "Mid_Layer_3-GND" (solid, remove dead copper, pour order 1002): -7.5,7.5 -7.5,-7.5 7.5,-7.5 7.5,7.5
GND on Mid Layer 4 "Mid_Layer_4-GND" (solid, remove dead copper, pour order 1006): -7.5,7.5 -7.5,-7.5 7.5,-7.5 7.5,7.5
GND on Bottom Layer "Bottom_Layer-GND" (solid, remove dead copper, pour order 1001): -7.5,7.5 -7.5,-7.5 7.5,-7.5 7.5,7.5
GND on Top Layer "Top_Layer-GND" (solid, remove dead copper, pour order 1000): -7.5,7.5 -7.5,-7.5 7.5,-7.5 7.5,7.5

## Keep-outs
Keep-Out Layer:
  the board outline again, w0.152

## Other copper
Top Layer:
  rectangle net GND: -0.275,-0.625 0.625,0.275
  rectangle net RF: 4.756,-0.556 5.556,0.206
  pour cut-out: 2.386,-2.45 2.375,-5.85 4.875,-5.85 4.875,-2.45
  pour cut-out: -3.867,1.475 -3.283,1.475 -3.283,1.018 -3.867,1.018
  pour cut-out: -1.167,-3.218 -0.583,-3.218 -0.583,-3.675 -1.167,-3.675
  region net GND: 1.906,-0.525 2.053,-0.672 2.053,-0.937 1.637,-0.937 1.499,-0.799 1.499,-0.525
  region net GND: -2.224,1.176 -1.172,1.176 -1.123,1.225 -1.123,1.309 -1.416,1.602
Mid Layer 1:
  pour cut-out: 6.426,-1.245 3.175,-1.245 2.337,-0.406 1.676,-0.406 1.676,0.895 6.426,0.895
Mid Layer 2:
  pour cut-out: 6.426,-1.245 3.175,-1.245 2.337,-0.406 0.813,-0.406 0.813,0.895 6.426,0.895

## Silkscreen, mask and mechanical layers (free items; w line width, h text height)
Mechanical 1:
  the board outline again, w0.152

## Dimensions
5.775,-6.675 to 5.775,5.325 on Mechanical 3
5.775,-6.675 to -6.225,-6.675 on Mechanical 3